# EAGLE board Frequency Counter v2 (EAGLE 9.1.2)
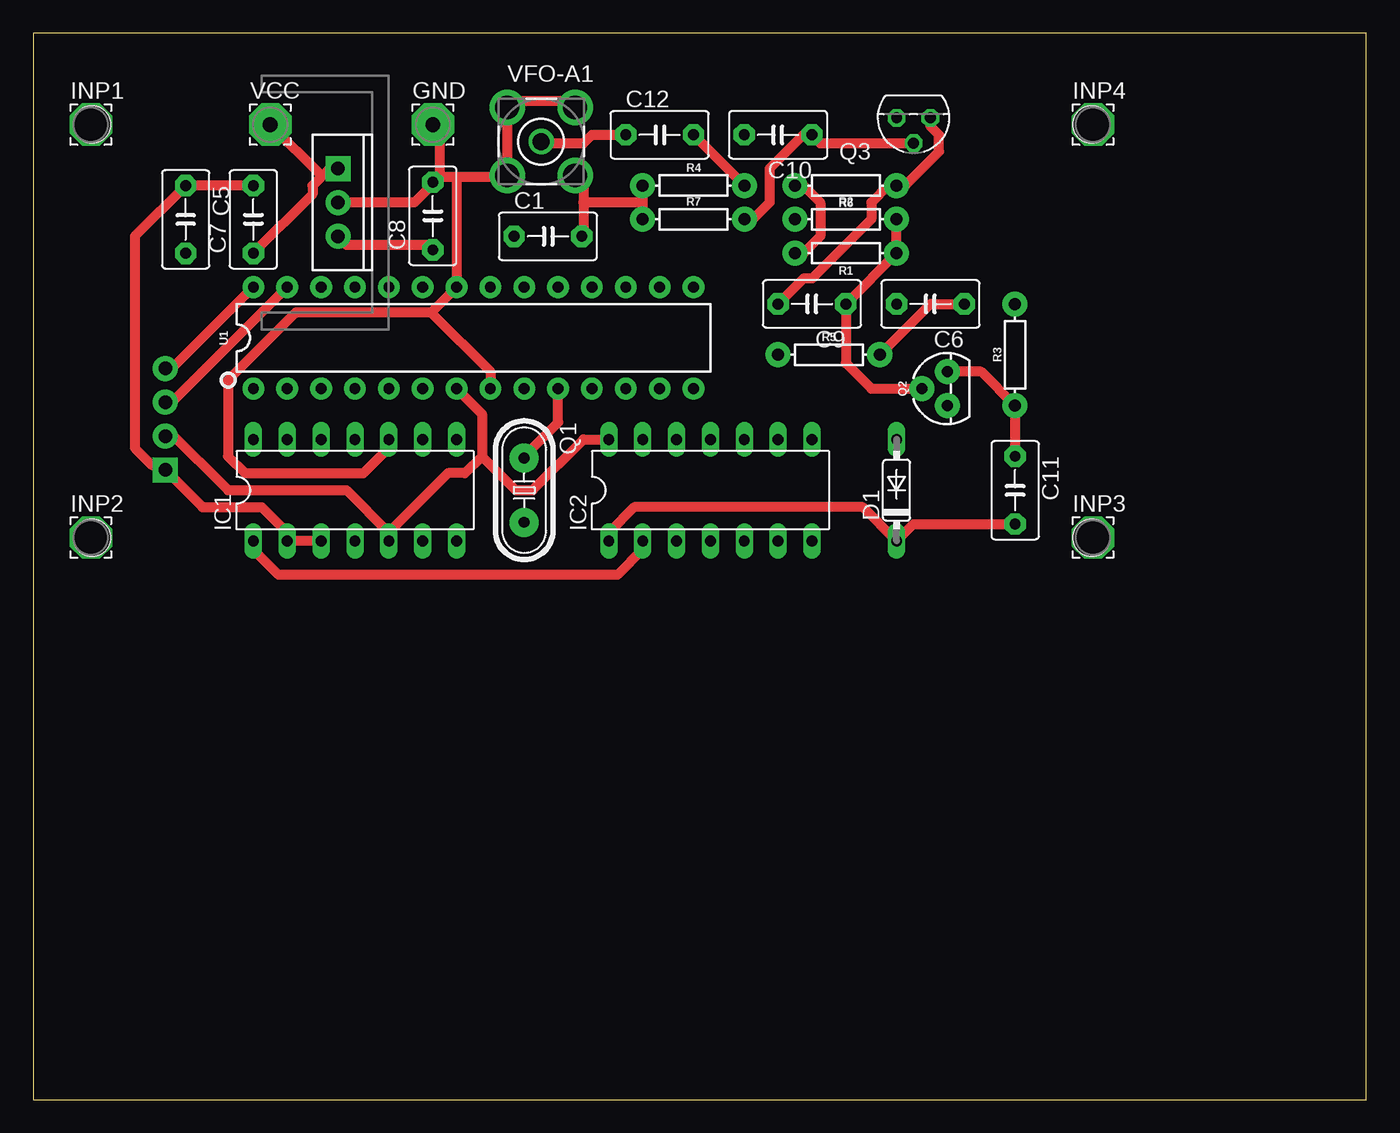
[diagram p0: board, top side]
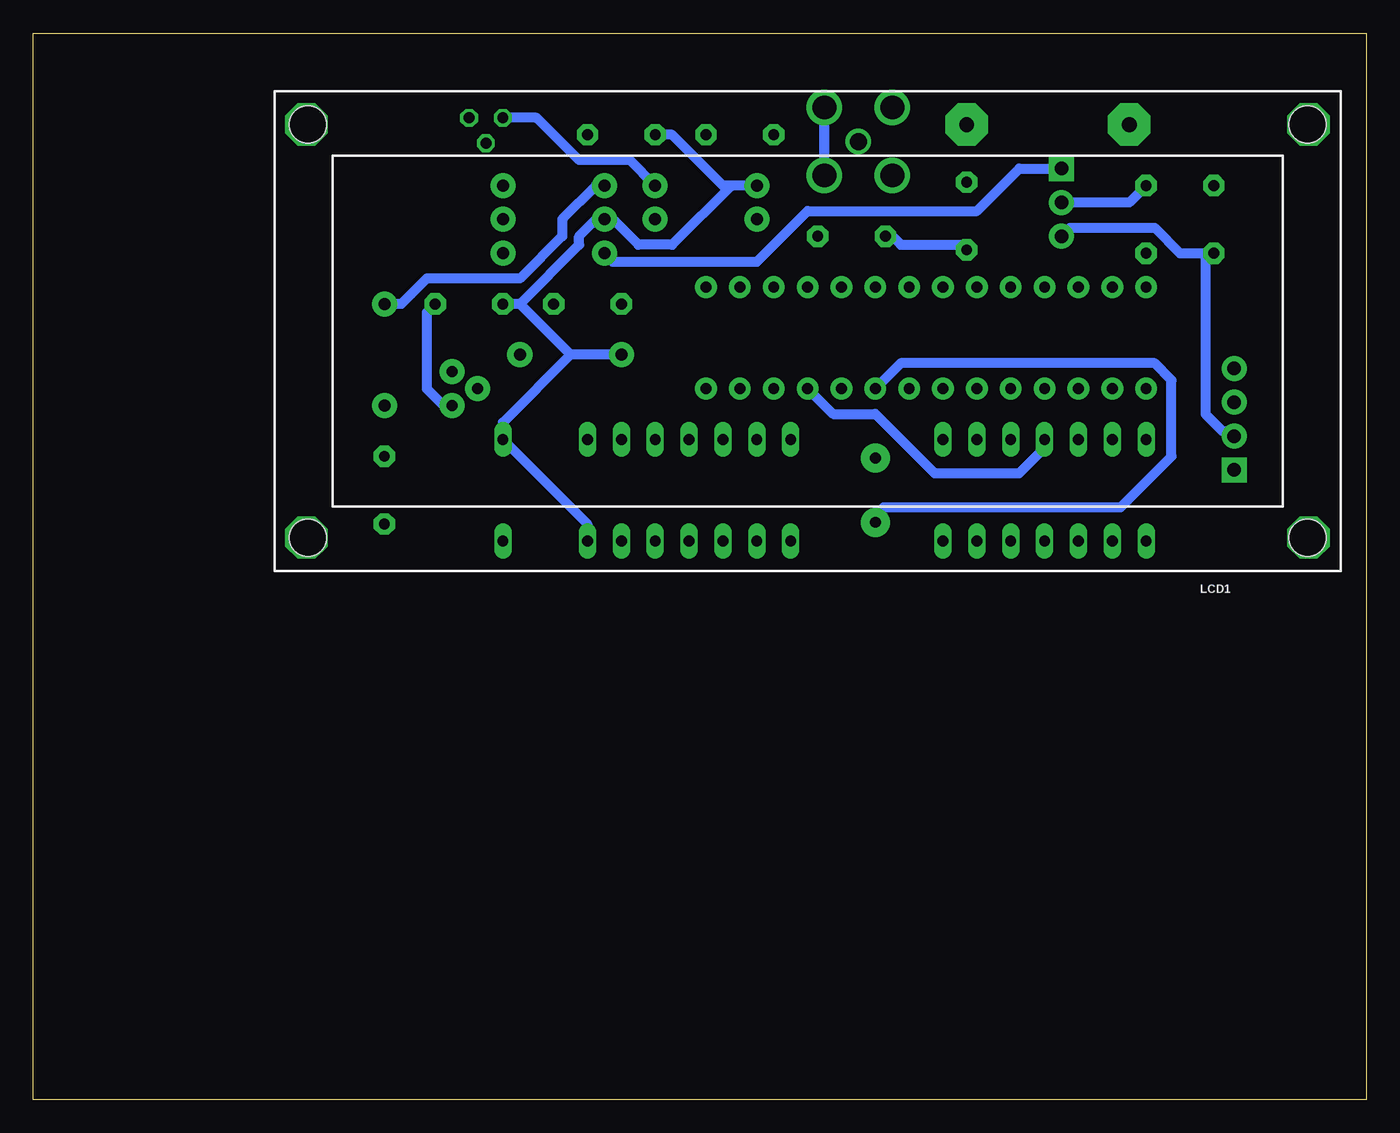
[diagram p1: board, bottom side, seen from below]

Size 100 x 80 mm. Coordinates in mm from the lower left corner, seen from the top.
Outline: 0,0 100,0 100,80 0,80 0,0
Copper layers (1*16): Top 0.035mm / dielectric 1.5mm / Bottom 0.035mm
Design rules "default": minimum track width 6mil, minimum drill 0.35mm, track to track 6mil, track to pad 6mil, pad to pad 6mil, via to via 6mil, smd to smd 6mil, copper to edge 40mil, drill to drill 6mil, minimum pad ring 10mil, minimum via ring 8mil, stop-mask expansion 4mil, vias tented up to drill 0mil, thermal gap 10mil
Net classes: 0 default: width 0.254 mm, drill 0.254 mm, clearance 0.254 mm

## Footprints (pad centres in the part's own frame; a part is rotated, then mirrored left to right if it is on the bottom)
C5B3.5 = drill 0.813 pad 1.6 octagon: 1 -2.54,0; 2 2.54,0
DO35-7 = drill 0.813 long: A 3.81,0; C -3.81,0
3,17/1,1 = drill 1.118 pad 3.175 octagon: 1 0,0
DIL14 = drill 0.813 long: 1 -7.62,-3.81; 2 -5.08,-3.81; 3 -2.54,-3.81; 4 0,-3.81; 5 2.54,-3.81; 6 5.08,-3.81; 7 7.62,-3.81; 8 7.62,3.81; 9 5.08,3.81; 10 2.54,3.81; 11 0,3.81; 12 -2.54,3.81; 13 -5.08,3.81; 14 -7.62,3.81
LCD-16X2-I2C = drill 1.016 pad 1.88 square: 1 -32,10.42 | drill 1.016 pad 1.88: 2 -32,7.88; 3 -32,5.34; 4 -32,2.8 | hole 2.8: -37.5,15.5; -37.5,-15.5; 37.5,15.5; 37.5,-15.5
HC49/S = drill 0.813 pad 2.184: 1 -2.413,0; 2 2.413,0
TO-92 = drill 0.813 pad 1.88: 1 -1.27,0; 2 0,1.905; 3 1.27,0
TO92R = drill 0.813 octagon: D -1.27,0; G 1.27,0; S 0,1.905
AXIAL-0.3 = drill 0.9 pad 1.88: P$1 -3.81,0; P$2 3.81,0
DIP28 = drill 0.813 pad 1.626: 1 -16.51,-3.81; 2 -13.97,-3.81; 3 -11.43,-3.81; 4 -8.89,-3.81; 5 -6.35,-3.81; 6 -3.81,-3.81; 7 -1.27,-3.81; 8 1.27,-3.81; 9 3.81,-3.81; 10 6.35,-3.81; 11 8.89,-3.81; 12 11.43,-3.81; 13 13.97,-3.81; 14 16.51,-3.81; 15 16.51,3.81; 16 13.97,3.81; 17 11.43,3.81; 18 8.89,3.81; 19 6.35,3.81; 20 3.81,3.81; 21 1.27,3.81; 22 -1.27,3.81; 23 -3.81,3.81; 24 -6.35,3.81; 25 -8.89,3.81; 26 -11.43,3.81; 27 -13.97,3.81; 28 -16.51,3.81
TO220-IGO = drill 1 pad 1.88: GND 0,0; OUT 2.54,0 | drill 1 pad 1.88 square: IN -2.54,0
BU-SMA-V = drill 1.27: 1 0,0 | drill 1.778: 2 -2.55,2.55; 3 2.55,2.55; 4 2.55,-2.55; 5 -2.55,-2.55

## Placement (x,y rotation side)
C1  100hF  [C5B3.5]  38.61,64.77 0 top
C5  100nF  [C5B3.5]  11.43,66.04 270 top
C6  100nF  [C5B3.5]  67.31,59.69 180 top
C7  100uF  [C5B3.5]  16.51,66.04 90 top
C8  22uf  [C5B3.5]  29.97,66.29 90 top
C9  100nF  [C5B3.5]  58.42,59.69 180 top
C10  100nF  [C5B3.5]  55.88,72.39 180 top
C11  100nF  [C5B3.5]  73.66,45.72 270 top
C12  100nF  [C5B3.5]  46.99,72.39 0 top
D1  1N4148DO35-7  [DO35-7]  64.77,45.72 90 top
GND  [3,17/1,1]  29.97,73.15 0 top
IC1  74LS93N  [DIL14]  24.13,45.72 0 top
IC2  74AC14N  [DIL14]  50.8,45.72 0 top
INP1  [3,17/1,1]  4.32,73.15 0 top
INP2  [3,17/1,1]  4.32,42.16 0 top
INP3  [3,17/1,1]  79.5,42.16 0 top
INP4  [3,17/1,1]  79.5,73.15 0 top
LCD1  LCD-16X2-I2C  [LCD-16X2-I2C]  41.91,57.66 180 bottom
Q1  [HC49/S]  36.83,45.72 270 top
Q2  200mA/40V  [TO-92]  68.58,53.34 90 top
Q3  J310  [TO92R]  66.04,73.66 180 top
R1  39k  [AXIAL-0.3]  60.96,63.5 180 top
R2  7.5k  [AXIAL-0.3]  60.96,66.04 0 top
R3  1k  [AXIAL-0.3]  73.66,55.88 90 top
R4  1M  [AXIAL-0.3]  49.53,68.58 0 top
R5  100  [AXIAL-0.3]  59.69,55.88 0 top
R6  1.8k  [AXIAL-0.3]  60.96,68.58 180 top
R7  270  [AXIAL-0.3]  49.53,66.04 0 top
U1  328P  [DIP28]  33.02,57.15 0 top
U2  [TO220-IGO]  22.86,67.31 270 top
VCC  [3,17/1,1]  17.78,73.15 0 top
VFO-A1  BU-SMA-V  [BU-SMA-V]  38.1,71.88 0 top

## Library data of the parts
C1 C5-C12 = capacitor-wima
D1 = diode
GND INP1-INP4 VCC = wirepad
IC1 = 74xx-us
IC2 = 74xx-eu
LCD1 = SparkFun-Displays
Q1 = crystal
Q2 = SparkFun-DiscreteSemi; PROD_ID: TRANS-08447
Q3 = transistor-small-signal
R1-R7 = SparkFun-Resistors; PROD_ID: RES-12183
U1 = SparkFun-IC-Microcontroller; PROD_ID: IC-09136
U2 = SparkFun-IC-Power
VFO-A1 = con-coax; OC_FARNELL: unknown; OC_NEWARK: unknown

## Nets
5V: C1.1 C5.2 C8.1 IC1.5 IC2.14 LCD1.2 U1.7 U2.OUT
GND: C1.2 C5.1 C6.2 C7.2 C8.2 C10.2 D1.A GND.1 IC1.2 IC1.3 IC1.10 IC2.7 LCD1.1 R2.P$1 R4.P$1 R5.P$1 R7.P$1 U1.8 U1.22 U2.GND VFO-A1.2 VFO-A1.3 VFO-A1.4 VFO-A1.5
N$1: C12.1 VFO-A1.1
N$2: Q1.2 U1.9
N$3: Q1.1 U1.10
N$5: LCD1.3 U1.27
N$6: LCD1.4 U1.28
N$7: C12.2 Q3.G R4.P$2
N$8: C9.1 Q2.2 R1.P$1 R2.P$2
N$9: C9.2 Q3.D R6.P$1
N$10: C10.1 Q3.S R7.P$2
N$11: C11.2 D1.C IC2.1
N$12: C6.1 Q2.1 R5.P$2
N$13: C11.1 Q2.3 R3.P$1
N$14: IC1.1 IC2.2
N$15: IC1.11 U1.11
VCC: C7.1 R1.P$2 R3.P$2 R6.P$2 U2.IN VCC.1

## Tracks (layer width: path | path; a pad name or v marks a point on that pad's centre or on a via)
5V
  Top 0.762: 26.67,42.55 IC1.5 26.67,42.55 | 26.67,42.55 31.11,46.99 32.38,46.99 33.66,48.26 | 33.66,48.26 33.66,51.44 U1.7 | IC2.14 41.27,49.53 37.47,45.72 36.2,45.72 33.66,48.26 | U2.OUT 23.5,64.14 29.84,64.14 C8.1 | 26.67,42.55 23.5,45.72 14.61,45.72 10.16,50.16 LCD1.2
  Bottom 0.762: C8.1 30.48,64.14 34.92,64.14 35.56,64.77 C1.1 | 12.06,63.5 13.97,63.5 15.88,65.41 22.23,65.41 U2.OUT | 12.06,63.5 C5.2 12.06,63.5 | 12.06,63.5 12.06,51.44 10.79,50.16 10.16,50.16 LCD1.2
GND
  Top 0.762: IC1.10 26.67,48.9 24.77,46.99 15.88,46.99 14.61,48.26 14.61,53.98 19.68,59.05 29.84,59.05 | 29.84,59.05 U1.22 31.75,69.22 | U1.8 34.29,54.61 29.84,59.05 | 41.27,67.31 41.27,69.22 VFO-A1.4 | 41.27,67.31 41.27,64.77 C1.2 | R4.P$1 45.72,67.31 | 45.72,67.31 R7.P$1 | 45.72,67.31 41.27,67.31 | IC1.3 IC1.2 19.05,42.55 17.14,44.45 12.7,44.45 10.16,46.99 LCD1.1 9.53,47.62 8.89,47.62 7.62,48.9 7.62,64.77 C5.1 C7.2 | 30.48,69.22 30.48,73.03 GND.1 | 30.48,69.22 C8.2 | 31.75,69.22 34.92,69.22 VFO-A1.5 35.56,69.85 35.56,74.3 VFO-A1.2 35.56,74.93 40.64,74.93 VFO-A1.3 | 31.75,69.22 30.48,69.22 | 30.48,69.22 C8.2 | U2.GND 28.57,67.31 29.84,68.58 C8.2
  Bottom 0.762: IC2.7 58.42,43.18 D1.A 64.77,50.8 59.69,55.88 | 63.5,59.69 C6.2 | 59.69,55.88 63.5,59.69 | R5.P$1 59.69,55.88 | 63.5,59.69 59.05,64.14 59.05,64.77 57.78,66.04 R2.P$1 56.52,66.04 54.61,64.14 52.07,64.14 47.62,68.58 | VFO-A1.3 40.64,74.3 40.64,69.85 VFO-A1.4 | C10.2 52.07,72.39 48.26,68.58 47.62,68.58 | R4.P$1 47.62,68.58 | U2.GND 17.78,67.31 C7.2
N$1
  Top 0.762: C12.1 41.91,72.39 41.27,71.75 38.1,71.75 VFO-A1.1
N$2
  Bottom 0.762: U1.9 34.92,55.24 15.88,55.24 14.61,53.98 14.61,48.26 18.41,44.45 36.2,44.45 36.83,43.81 Q1.2
N$3
  Top 0.762: U1.10 39.37,50.8 36.83,48.26 Q1.1
N$5
  Top 0.762: U1.27 10.16,52.07 LCD1.3
N$6
  Top 0.762: U1.28 10.16,54.61 LCD1.4
N$7
  Top 0.762: R4.P$2 C12.2
  Bottom 0.762: Q3.G 62.23,73.66 59.05,70.48 55.24,70.48 R4.P$2
N$8
  Top 0.762: R2.P$2 R1.P$1 C9.1 60.96,55.24 62.87,53.34 Q2.2
N$9
  Top 0.762: Q3.D 67.31,73.03 67.94,72.39 67.94,71.12 65.41,68.58 R6.P$1 64.14,68.58 62.87,67.31 62.87,66.04 58.42,61.59 57.78,61.59 C9.2
N$10
  Top 0.762: Q3.S 59.05,71.75 C10.1 57.78,72.39 55.24,69.85 55.24,67.31 53.98,66.04 R7.P$2
N$11
  Top 0.762: IC2.1 43.18,42.55 45.09,44.45 62.23,44.45 D1.C 66.04,43.18 C11.2
N$12
  Top 0.762: C6.1 67.31,59.69 R5.P$2
  Bottom 0.762: Q2.1 69.22,52.07 70.48,53.34 70.48,59.05 C6.1
N$13
  Top 0.762: C11.1 R3.P$1 71.12,54.61 Q2.3
N$14
  Top 0.762: IC1.1 16.51,41.27 18.41,39.37 43.81,39.37 45.72,41.27 IC2.2
N$15
  Bottom 0.762: IC1.11 24.13,48.9 26.04,46.99 32.38,46.99 36.83,51.44 40.01,51.44 U1.11
VCC
  Top 0.762: C7.1 20.95,67.94 20.95,68.58 21.59,69.22 21.65,69.28 | 21.65,69.28 22.23,69.85 U2.IN | 21.65,69.28 VCC.1 | R1.P$2 57.78,63.5 59.05,64.77 59.05,67.31 57.78,68.58 R6.P$2
  Bottom 0.762: R3.P$2 72.39,59.69 70.48,61.59 63.5,61.59 60.33,64.77 60.33,66.04 57.78,68.58 R6.P$2 | U2.IN 26.04,69.85 29.21,66.67 41.91,66.67 45.72,62.87 56.52,62.87 R1.P$2